# Altium PCB dalang-v1.3_20211125.PcbDoc (part 2 of 5)
Units mil, origin at the board's own origin, x right, y up, seen from the top; angles counter-clockwise.
Board outline 4000 x 3999.92 mil, 4 copper layers (Top, gnd, vcc, Bottom), stack 35.4 mil thick; 365 components, 335 nets, 1640 pads, 1414 vias.
Unrouted connection lines stored in the file: 894.
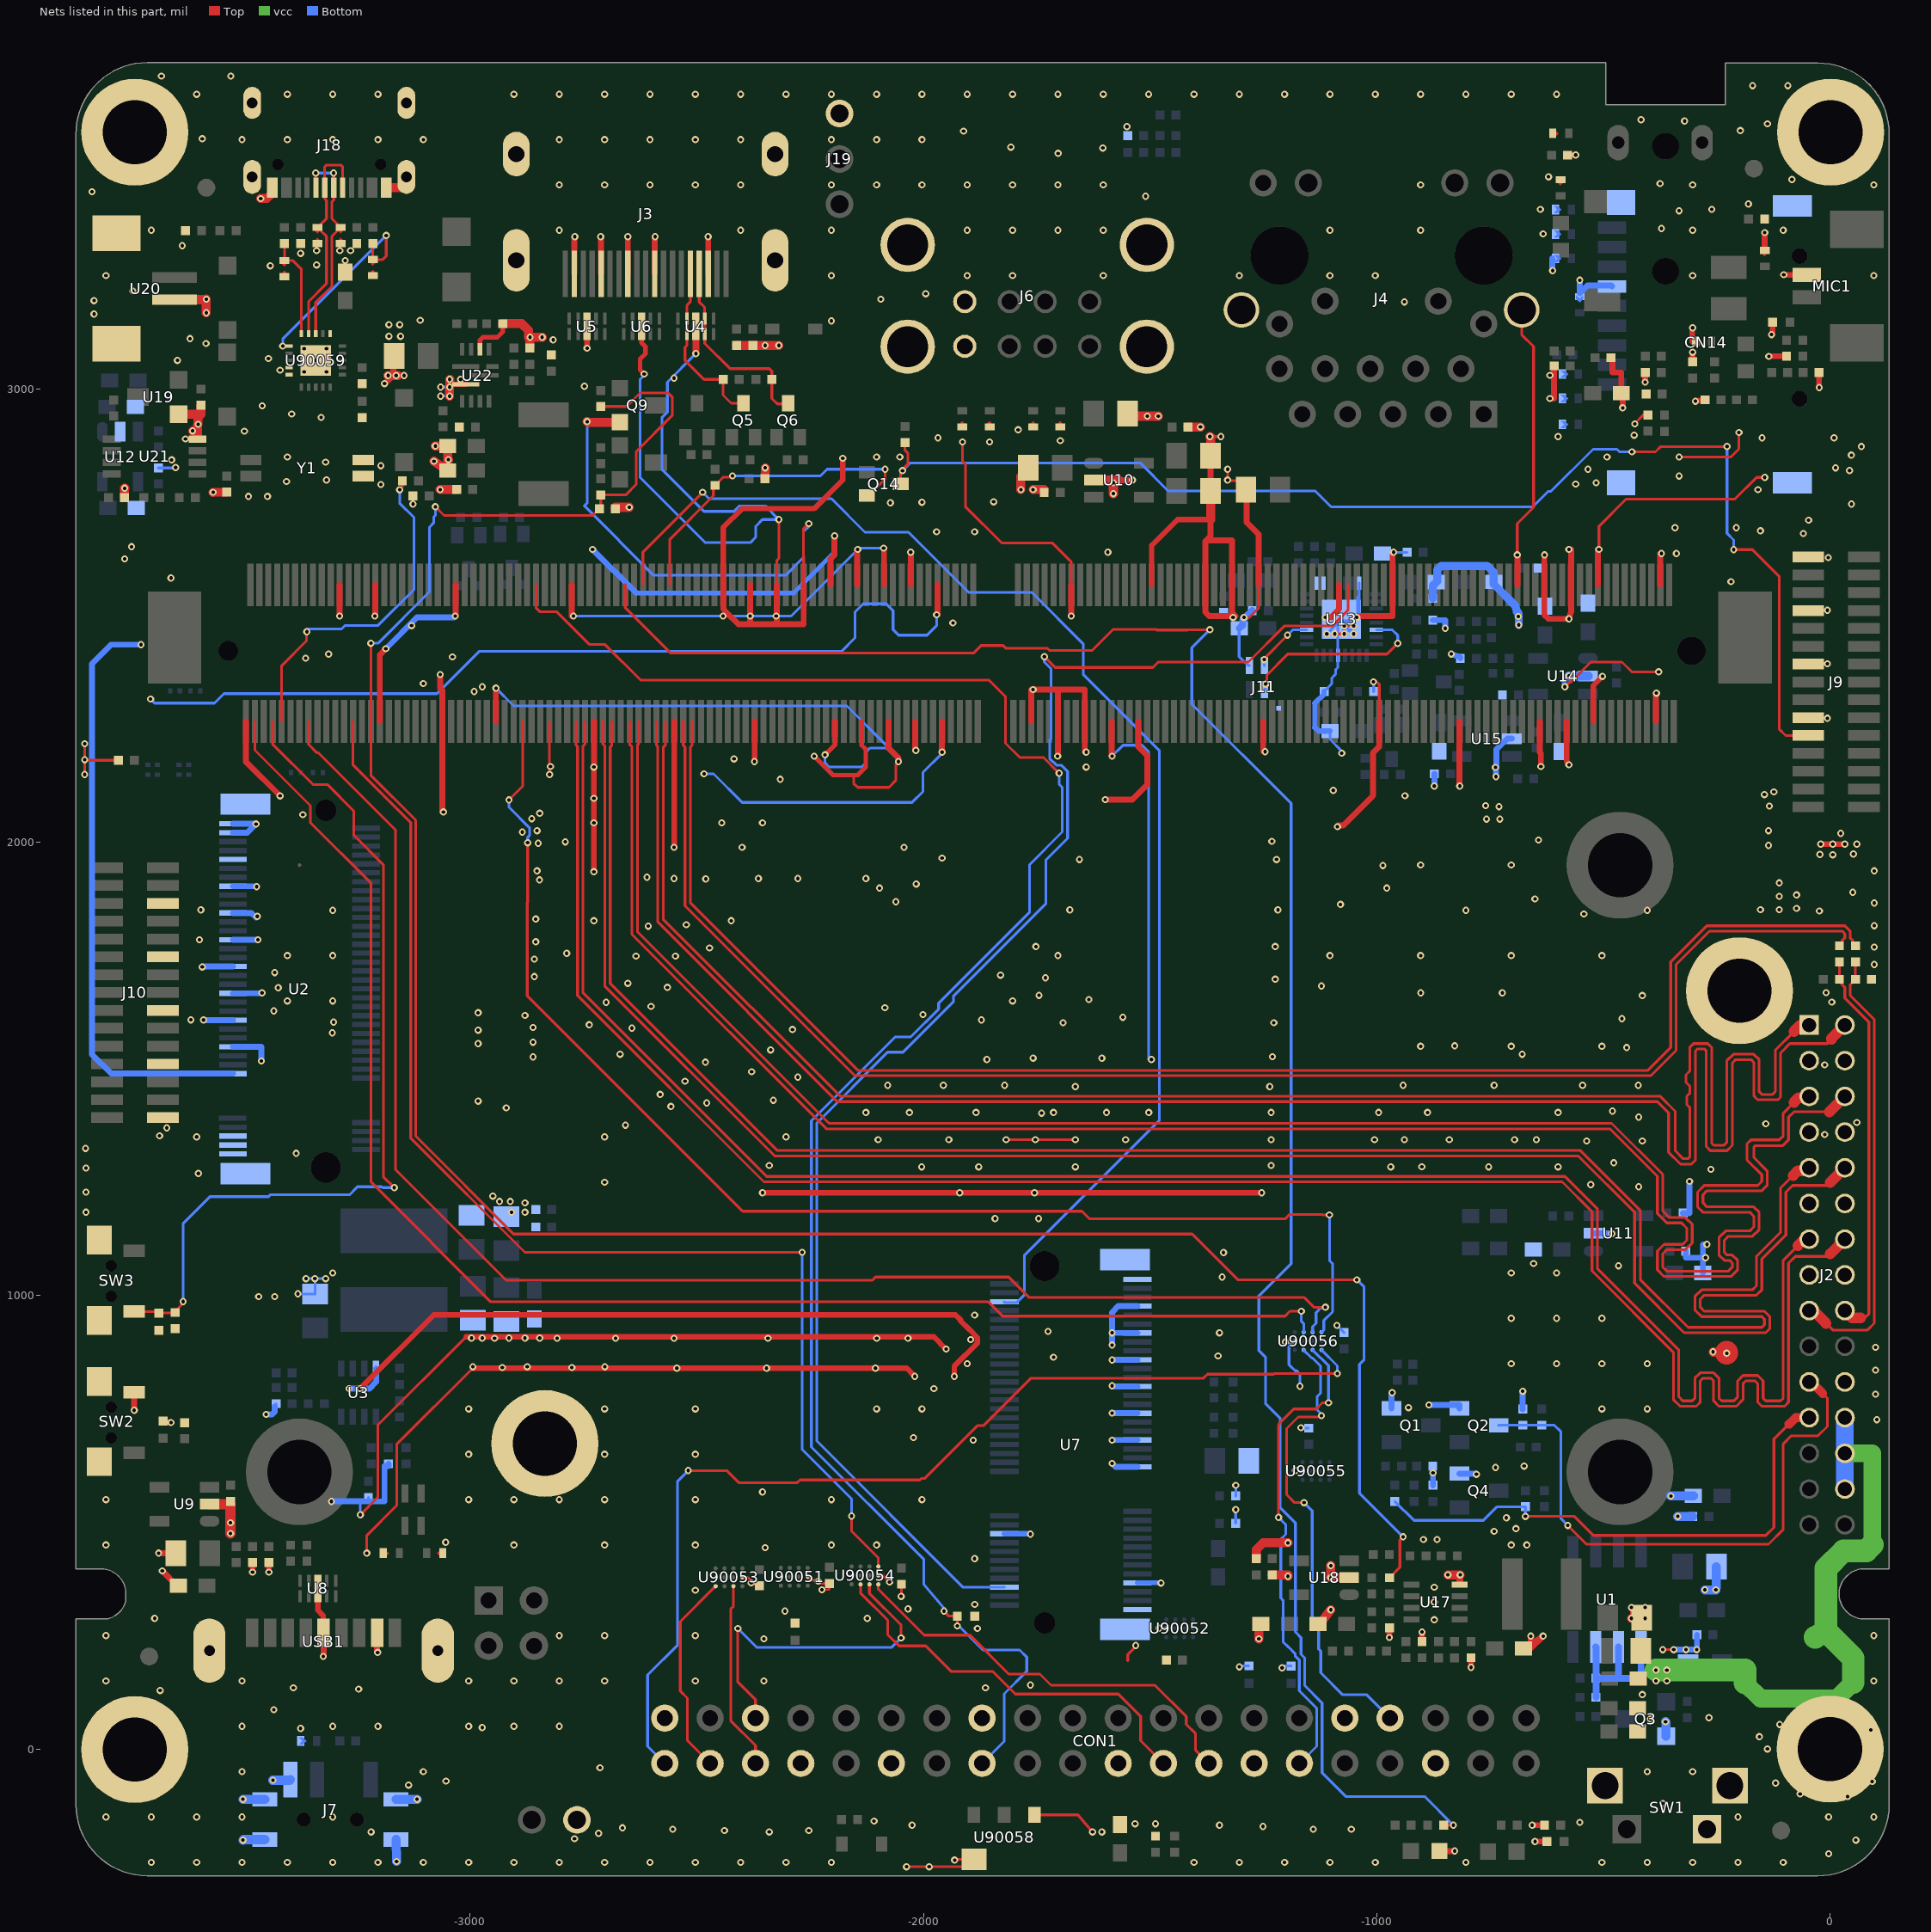
[diagram p3: the nets of this part, all layers, seen from the top]

## Via types
v1: diameter 15.75, hole 7.87, Top to Bottom, 1414 vias

## Nets (pads, with @x,y where several pads share a name; then routed paths per layer and width w, separated by ;. In a path a pad name is that pad's centre, name@x,y a point inside that pad or via, vN(x,y) a via of type N, cw(c..) or ccw(c..) an arc to the next point about the centre after c; other vN are vias at no path point) (continued)
ADC0_IN1: CON1.26 ED28.1 | length 4154.8
  Top w5.91: v1(-1954.72,304.13) -1943.71,293.12 ED28.1@-1925.2,293.12 v1(-1925.2,271.65)
  Top w6: -2854.72,2567.72 -2854.72,2517.47 -2845.48,2508.23 -2808.68,2508.23 -2737.19,2436.74 -2702.96,2436.74 -2623.89,2357.67 -1855.5,2357.67 -1818.95,2321.13 -1818.95,2218.46 -1787.77,2187.28 -1735.51,2187.28 v1(-1700.79,2152.56)
  Bottom w5.91: v1(-1954.72,304.13) -1949.37,304.13 -1951.61,306.77 -1999.02,362.63 -1999.02,417.9 -2247.09,665.98 -2247.09,1385.64 -2061.86,1570.87 -2027.75,1570.87 -1966.54,1632.08 -1966.54,1645.32 -1765.75,1846.11 -1765.75,1951.01 -1693.82,2022.94 -1693.82,2121.43 -1700.79,2128.4 v1(-1700.79,2152.56) ; v1(-1925.2,271.65) -1922.24,271.65 -1869.09,218.5 -1787.83,218.5 -1772.14,202.81 -1772.14,171.21 -1821.85,121.51 -1821.85,16.73 CON1.26@-1870.47,-31.89
BL_ADJ1: J2.23 R16.2 R18.1 | length 1204.3
  Top w5.91: v1(-672,513) -563.98,513 -521.98,471 -491.03,471
  Top w6: -491.03,471 -141.73,471 -124.02,488.72 -124.02,683.62 -90.82,716.81
  Top w19.68: -90.82,716.81 -89.4,716.81 -75.35,730.86 J2.23@-46,730.86
  Bottom w6: R16.2@-960,546.28 -918,504.28 -765,504.28 -735.28,534 -672.28,534 R18.1@-672,534.28 v1(-672,513)
BL_EN1: C12.1 J2.21 Q2.3 R10.1 | length 1281.2
  Top w5.91: v1(-578.74,493.11) -537.4,451.77 -135.83,451.77 -103.35,484.25 -103.35,673.23 -85.63,690.94 -26.57,690.94 -5.91,711.61 -5.91,773.62 -16.24,783.96
  Top w19.68: J2.21@-46,809.6 -41.88,809.6 -16.24,783.96
  Bottom w5.91: -608.27,714.28 -593.5,699.52 -593.5,507.87 v1(-578.74,493.11)
  Bottom w6: Q2.3@-730.69,714 -730.41,714.28 -608.27,714.28
BT_WAKE: U7.70 | length 2919.3
  Top w6: -2618.5,2567.72 -2618.5,2625 -2619,2625 -2619,2640 v1(-2487,2772)
  Bottom w6: v1(-2487,2772) -2472.87,2757.87 -2202.87,2757.87 -2129.06,2684.06 -2033.06,2684.06 -1900.18,2551.18 -1761.02,2551.18 -1647.64,2437.8 -1647.64,2370.31 -1479.33,2202 -1479.33,1386.88 -1777.56,1088.65 -1777.56,1001.49 -1794.15,984.9 -1821.46,984.9 U7.70@-1821.46,986.62
CAM_PWR: J9.5 Q14.3 R136.2 | length 2795.4
  Top w5.91: Q14.3@-2050.2,2790.35 -2050.2,2818.25 v1@-2048.57,2819.88 ; v1(-2046.26,2819.88) v1@-2048.57,2819.88 ; R136.2@-2040.35,2881.89 -2040.44,2881.97 -2041.2,2881.97 -2041.2,2865.38 -2034.45,2858.63 -2034.45,2834 v1@-2048.57,2819.88 ; v1(-437.01,2861.22) -385.17,2861.22 -373.36,2873.03 v1(-227.36,2873.03) ; v1(-212.6,2645.67) -171.26,2645.67 -112.2,2586.61 -112.2,2250 -97.69,2235.48 J9.5@-48,2235.48
  Bottom w5.91: v1(-2046.26,2819.88) -2029.19,2836.95 -1521.9,2836.95 -1459.95,2775 -1135.5,2775 -1100.55,2740.05 -655.95,2740.05 -622.05,2773.95 -615.81,2773.95 -522.64,2867.13 -470.24,2867.13 -464.34,2861.22 v1(-437.01,2861.22) ; v1(-227.36,2873.03) -227.36,2681.62 -212.6,2666.86 v1(-212.6,2645.67)
CAM_PWR1: Q14.2 R120.1 | length 727.8
  Top w5.91: R120.1@-2459.65,2787.4 -2441.93,2805.12 -2424.21,2805.12 v1(-2421.26,2808.07) ; Q14.2@-2125,2764.76 -2121.06,2764.76 -2084.65,2801.18 v1(-2084.65,2822.83)
  Top w6: -2559.45,2567.72 -2559.45,2668.39 -2463.33,2764.51 -2463.33,2783.72 R120.1@-2459.65,2787.4
  Bottom w5.91: v1(-2421.26,2808.07) -2227.39,2808.07 -2212.63,2822.83 v1(-2084.65,2822.83)
CARRIER_PWR_ON: R90557.2 | length 765.6
  Top w5.91: -3415.75,2266.54 -3415.75,2389.76 -3360.63,2444.88 -3360.63,2470.08 v1(-3360.24,2464.57) ; v1(-3155.51,2777.56) -3149.61,2783.46 R90557.2@-3149.61,2797.24
  Bottom w5.91: v1(-3360.24,2464.57) -3360.24,2470.47 -3283.46,2470.47 -3275.59,2478.35 -3202.76,2478.35 -3124.02,2557.09 -3124.02,2716.54 -3155.51,2748.03 v1(-3155.51,2777.56)
CC1: ED8122.1 R109.2 U90059.11 | length 466
  Top w5.91: v1(-3413.39,3094.49) U90059.11@-3399.61,3094.49 ; R109.2@-3214.57,3320.87 ED8122.1@-3214.57,3285.43 -3208.57,3285.43 -3207.07,3285.43 -3192.91,3285.43 -3185.04,3293.31 v1(-3185.04,3338.58)
  Bottom w5.91: v1(-3413.39,3094.49) -3413.39,3110.24 v1(-3185.04,3338.58)
CC2: ED8123.1 R108.2 U90059.10 | length 224.7
  Top w5.91: R108.2@-3409.45,3320.87 ED8123.1@-3409.45,3283.46 -3403.45,3283.46 -3401.95,3283.46 -3391.73,3283.46 -3372.05,3263.78 U90059.10@-3372.05,3122.05
DDC_SCL: J3.15 Q5.3 R29.2 U4.2 U4.9 | length 384.3
  Top w6: J3.15@-2514.25,3253.6 -2514.25,3192 -2520,3186.25 -2520,3186 -2521.69,3184.32 U4.9@-2521.69,3155.22 U4.2@-2521.69,3120.78 -2521.69,3096 -2526,3091.68 -2526,3063 -2484,3021 R29.2@-2441.72,3021 -2442,3020.72 -2442,2986.4 -2424,2968.4 Q5.3@-2397,2968.4
DDC_SDA: J3.16 Q6.3 R31.2 U4.4 U4.7 | length 433.6
  Top w6: J3.16@-2494.56,3253.6 -2494.56,3192 -2482.56,3180 -2482.56,3155.47 U4.7@-2482.32,3155.22 U4.4@-2482.32,3120.78 -2482.32,3100.32 -2426.72,3044.72 -2340,3044.72 -2334.28,3039 R31.2@-2334.28,3021 -2334.28,2979 -2322.28,2967 -2299.4,2967 Q6.3@-2298,2968.4
DM: ED8121.1 J18.A7 J18.B7 U90059.9 | length 491.2
  Top w5.91: U90059.9@-3356.3,3122.05 -3356.3,3192.91 -3316.93,3232.28 -3316.93,3336.61 -3330.61,3350.3 -3332.11,3351.8 -3333.11,3352.8 ED8121.1@-3336.61,3356.3 -3316.93,3375.98 -3316.93,3415.75 -3320.47,3419.29 J18.A7@-3320.47,3444.09 -3320.87,3444.49 -3320.87,3490.16 -3316.93,3494.09 -3285.43,3494.09 -3281.1,3489.76 J18.B7@-3281.1,3444.09
DMIC_CLK: J11.3 U13.11 | length 135.7
  Top w6: v1(-1248,2403) -1248,2406 v1(-1197,2457)
  Bottom w5.91: v1(-1197,2457) -1185.5,2468.5 U13.11@-1154.53,2468.5
  Bottom w6: v1(-1248,2403) -1248,2390.15 J11.3@-1247.54,2390.15
DMIC_SDA: J11.4 U13.30 | length 423.1
  Top w6: v1(-1245,2349) -1242.52,2349 -1242.52,2368.94 -1196.46,2415 -977.72,2415 v1(-953.74,2438.98)
  Bottom w5.91: U13.30@-1000.98,2468.5 -965.55,2468.5 -953.74,2456.69 v1(-953.74,2438.98)
  Bottom w6: J11.4@-1247.54,2337 -1245,2339.54 v1(-1245,2349)
DP: ED8120.1 J18.A6 J18.B6 U90059.8 | length 459.1
  Top w5.91: U90059.8@-3340.55,3122.05 -3340.55,3190.94 -3305.12,3226.38 -3305.12,3336.61 -3290.93,3350.8 -3289.43,3352.3 -3287.93,3353.8 ED8120.1@-3285.43,3356.3 -3305.12,3375.98 -3305.12,3412.99 -3300.79,3417.32 -3300.79,3475.98 v1(-3301.18,3476.38) ; v1(-3340.55,3476.38) -3340.55,3444.49 J18.B6@-3340.16,3444.09
  Bottom w5.91: v1(-3340.55,3476.38) v1(-3301.18,3476.38)
EDP_AUXN: C7.2 J2.18 R6.1 | length 866.8
  Top w5.91: C7.2@20.67,1736.22 20.67,1691.93 32.48,1680.12 32.48,1656.5 85.63,1603.35 85.63,959.65 76.77,950.79 67.91,950.79
  Top w23.62: J2.18@32.74,967.08 49.03,950.79 67.91,950.79
EDP_AUXP: C6.2 J2.17 R7.1 | length 992.9
  Top w5.91: J2.17@-46,964.59 J2.17@-46,967.08 ; -8.86,938.98 5.91,924.21 82.68,924.21 97.44,938.98 97.44,1609.25 44.29,1662.4 44.29,1686.02 R7.1@56.1,1697.83 C6.2@56.1,1736.22
  Top w23.62: J2.17@-46,964.59 -34.47,964.59 -8.86,938.98
EDP_TX0N: J2.2 | length 4193.8
  Top w6: -2588.98,2266.54 -2588.98,2213.98 -2586,2211 -2586,1824 -2190,1428 -381,1428 -356.24,1403.24 -356.24,1316.24 -330,1290 -306,1290 -297,1299 -297,1539.55 -292.33,1544.22 -277.56,1544.29 -273,1539.73 -273,1328.88 -264,1319.88 -227.23,1319.88 -215.42,1331.69 -215.42,1513.52 -208.27,1520.67 -174.21,1520.67 -168.31,1514.76 -168.31,1440.94 -159.45,1432.09 -115.16,1432.09 -109.25,1437.99 -109.25,1535.43 -88.58,1556.1 -5.2,1556.1 2.99,1564.93 ; J2.2@28.56,1592.49 J2.2@32.74,1597
  Top w23.62: 2.99,1564.93 2.99,1566.92 J2.2@28.56,1592.49
EDP_TX0P: J2.1 | length 4096.5
  Top w6: -2569.29,2266.54 -2569.29,2214 -2574,2209.29 -2574,1830 -2184,1440 -375,1440 -341.52,1406.52 -341.52,1319.52 -324,1302 -313.5,1302 -309,1306.5 -309,1414.37 -315.94,1421.31 -315.94,1439.91 -309,1446.85 -309,1461.61 -317.86,1470.47 -317.86,1487.15 -309,1496.01 -309,1548.28 -301.18,1556.1 -269.86,1556.1 -261,1547.24 -261,1336.19 -256.5,1331.69 -233.91,1331.69 -228,1337.6 -228,1517.72 -213.24,1532.48 -168.31,1532.48 -156.5,1520.67 -156.5,1449.8 -150.59,1443.9 -126.97,1443.9 -120.84,1450.02 -120.84,1541.34 -79.5,1582.68
  Top w23.62: -79.5,1582.68 -65.18,1597 J2.1@-46,1597
EDP_TX1N: J2.6 | length 4330.3
  Top w6: -2648.03,2266.54 -2648.03,2216.03 -2643,2211 -2643,1797 -2214,1368 -485.59,1368 -380.91,1263.32 -380.91,1181.1 -360.24,1160.43 -327.76,1160.43 -315.94,1148.62 -315.94,1122.05 -324.8,1113.19 -366.14,1113.19 -380.91,1098.43 -380.91,1057.09 -366.14,1042.32 -218.5,1042.32 -203.74,1057.09 -203.74,1077.76 -215.55,1089.57 -227.36,1089.57 -233.27,1095.47 -233.27,1122.05 -224.41,1130.91 -171.26,1130.91 -156.5,1145.67 -156.5,1184.06 -168.31,1195.87 -271.65,1195.87 -280.51,1204.72 -280.51,1222.44 -271.65,1231.3 -150.59,1231.3 -138.78,1243.11 -138.78,1275.59 -168.31,1305.12 -168.31,1327.09 -164.53,1330.87 -104.17,1330.87 -91.54,1343.5 -91.54,1393.7 -79.72,1405.51 -1.27,1405.51
  Top w23.62: -1.27,1405.51 J2.6@32.74,1439.52
EDP_TX1P: J2.5 | length 4229.3
  Top w6: -2628.35,2266.54 -2628.35,2216.65 -2631,2214 -2631,1803 -2208,1380 -481.78,1380 -369.09,1267.31 -369.09,1187.01 -354.33,1172.24 -318.9,1172.24 -304.13,1157.48 -304.13,1116.14 -318.9,1101.38 -360.24,1101.38 -369.09,1092.52 -369.09,1062.99 -360.24,1054.13 -224.41,1054.13 -215.55,1062.99 -215.55,1071.85 -221.46,1077.76 -233.27,1077.76 -245.08,1089.57 -245.08,1127.95 -230.32,1142.72 -177.17,1142.72 -168.31,1151.57 -168.31,1175.2 -177.17,1184.06 -280.51,1184.06 -292.32,1195.87 -292.32,1228.35 -277.56,1243.11 -159.45,1243.11 -150.59,1251.97 -150.59,1266.73 -183.07,1299.21 -183.07,1334.65 -174.21,1343.5 -112.2,1343.5 -103.35,1352.36 -103.35,1402.56 -79.72,1426.18 ; J2.5@-48.86,1436.66 J2.5@-46,1439.52
  Top w23.62: -79.72,1426.18 -69.25,1436.66 J2.5@-48.86,1436.66
EDP_TX2N: J2.10 | length 4308.4
  Top w5.91: J2.10@23.62,1272.92 J2.10@30.86,1280.16
  Top w6: -2707.09,2266.54 -2707.09,2217 -2703,2212.91 -2703,1683 -2328,1308 -555.05,1308 -431.1,1184.06 -431.1,1027.56 -321.85,918.31 -141.73,918.31 -132.87,927.17 -132.87,953.74 -144.69,965.55 -277.56,965.55 -286.42,974.41 -286.42,992.13 -277.56,1000.98 -162.4,1000.98 -150.59,1012.8 -150.59,1080.7 -97.44,1133.85 -97.44,1228.35 -82.68,1243.11 -5.91,1243.11 0,1249.02 0,1249.3 ; J2.10@30.86,1280.16 J2.10@32.74,1282.04
  Top w23.62: 0,1249.3 J2.10@23.62,1272.92
EDP_TX2P: J2.9 | length 4203.5
  Top w5.91: -82.68,1263.78 -81.2,1265.26
  Top w6: -2687.4,2266.54 -2687.4,2214 -2691,2210.4 -2691,1689 -2322,1320 -550.67,1320 -418.48,1187.82 -418.48,1035.61 -312.99,930.12 -150.59,930.12 -144.69,936.02 -144.69,947.83 -150.59,953.74 -283.46,953.74 -298.23,968.5 -298.23,998.03 -283.46,1012.8 -171.26,1012.8 -162.4,1021.65 -162.4,1086.44 -109.25,1139.59 -109.25,1237.2 -82.68,1263.78 ; J2.9@-46,1275.59 J2.9@-46,1282.04
  Top w23.62: -81.2,1265.26 -70.87,1275.59 J2.9@-46,1275.59
EDP_TX3N: J2.14 | length 4443.1
  Top w6: -2766.14,2266.54 -2766.14,2214 -2766,2214 -2763,2211 -2763,1662 -2352,1251 -591,1251 -525,1185 -525,1054.75 -345.47,875.22 -345.47,770.76 -330.71,756 -295.18,756 -286.42,764.76 -286.42,812.01 -280.51,817.91 -262.8,817.91 -256.89,812.01 -256.89,767.81 -245.08,756 -206.6,756 -191.93,770.67 -191.93,806.1 -186.02,812.01 -165.35,812.01 -159.45,806.1 -159.45,764.86 -150.59,756 -100.39,756 -91.54,764.86 -91.54,1071.85 -76.77,1086.61 -5.21,1086.61 0.35,1092.17
  Top w23.62: 0.35,1092.17 J2.14@32.74,1124.56
EDP_TX3P: J2.13 | length 4333.7
  Top w6: -2746.46,2266.54 -2746.46,2217 -2751,2212.46 -2751,1668 -2346,1263 -585,1263 -513,1191 -513,1059 -333.79,879.79 -333.79,776.86 -324.93,768 -303.85,768 -298.23,773.62 -298.23,817.91 -286.42,829.72 -256.89,829.72 -245.08,817.91 -245.08,773.91 -239.17,768 -212.32,768 -203.74,776.57 -203.74,812.01 -191.93,823.82 -159.45,823.82 -147.64,812.01 -147.64,773.91 -141.73,768 -109.25,768 -103.35,773.91 -103.35,1077.76 -70.87,1110.24 ; J2.13@-47.24,1124.56 J2.13@-46,1124.56
  Top w23.62: -70.87,1110.24 -56.54,1124.56 J2.13@-47.24,1124.56
EDPAUXN: C7.1 | length 3398.9
  Top w6: -2529.92,2266.54 -2529.92,2214 -2526,2210.08 -2526,1860 -2151,1485 -395.67,1485 -339.57,1541.1 -339.57,1730.31 -265.75,1804.13 26.57,1804.13 32.48,1798.23 32.48,1789.37 26.57,1783.46 26.57,1777.56 C7.1@20.67,1771.65
EDPAUXP: C6.1 | length 3401.8
  Top w6: -2510.24,2266.54 -2510.24,2214 -2514,2210.24 -2514,1866 -2145,1497 -401.57,1497 -351.38,1547.2 -351.38,1736.22 -271.65,1815.94 32.48,1815.94 44.29,1804.13 44.29,1789.37 50.2,1783.46 50.2,1771.65 C6.1@56.1,1771.65
EXT_EN_H: R84.2 R95.2 R96.2 R98.1 | length 5320.5
  Top w6: v1(-3219,2439) -3218.9,2438.9 -3218.9,2147.63 -3120.08,2048.81 -3120.08,1351.76 -2904.15,1135.83 -1407.33,1135.83 -1306.5,1035 v1(-1044,1035) ; v1(-3076.77,2740.16) -3057.61,2721 -2729.72,2721 R98.1@-2714.72,2736 -2712,2738.72 R95.2@-2712,2766.28 -2656.9,2766.28 -2633.86,2789.33 -2633.86,2861.39 -2554.13,2941.11 -2554.13,2982.45 -2562.83,2991.14 -2625.11,2991.14 -2654.97,2961.28 R96.2@-2712,2961.28 ; R84.2@-972,377.72 -948.81,400.91 -948.81,461.19 v1(-942,468)
  Bottom w6: v1(-3219,2439) -3203.33,2439 -3089.69,2552.63 -3089.69,2695.18 -3080.5,2704.37 -3080.5,2717.16 -3076.77,2720.9 v1(-3076.77,2740.16) ; v1(-1044,1035) -1027.95,1018.95 -1027.95,859.06 -1038.19,848.82 -1038.19,564.19 v1(-942,468)
FORCE_RECOV#: C3.1 ED3.1 SW3.1 | length 1953.9
  Top w6: SW3.1@-3741.14,964.85 -3690.21,964.85 ED3.1@-3687,961.64 -3652.08,961.64 C3.1@-3651,962.72 -3651,965.52 -3635.05,981.48 -3635.05,984.95 v1(-3633,987) ; -3435.43,2266.54 -3435.43,2216.29 -3346.7,2127.56 -3315.25,2127.56 -3256.69,2069 -3256.69,2015.88 -3191.34,1950.52 -3191.34,1262.2 v1(-3167.32,1238.19)
  Bottom w6: v1(-3633,987) -3633,1159.45 -3573.95,1218.5 -3444.88,1218.5 -3440.94,1222.44 -3266.19,1222.44 -3248.47,1240.16 -3195.17,1240.16 -3193.21,1238.19 v1(-3167.32,1238.19)
FT1: C10.1 J2.24 J2.26 J2.28 R9.1 U1.1 U1.2 U1.3 | length 1787.2
  vcc w6: -153,111 -147,111
  vcc w39.37: J2.26@32.74,652.12 93.31,652.12 93.31,450.6
  vcc w40: -187.5,145.5 -153,111 ; -147,111 15,111 51,147
  vcc w50: v1(-384,174) v1(-360,174) -187.5,174 -187.5,145.5 ; -32.68,246.32 -8.86,260.14 ; 51,147 51,200.28 -8.86,260.14 ; 93.31,450.6 79.72,437.01 29.53,437.01 -8.86,398.62 -8.86,260.14
  Bottom w6: v1(-384,150) v1(-384,174) v1(-360,174) v1(-360,150)
  Bottom w15: U1.3@-517,225 -516.28,224.28 C10.1@-516.28,156 ; R9.1@-516.28,114 C10.1@-516.28,156 ; U1.2@-467,225 -467,156.5 -467.5,156 ; U1.1@-417,225 -417,168 ; v1(-384,174) -417,168 ; C10.1@-516.28,156 -467.5,156 ; -467.5,156 -429,156 -417,168
  Bottom w39.37: J2.28@32.74,573.38 J2.26@32.74,652.12 32.74,693.9 J2.24@32.74,730.86
GND: C1.2 C2.2 C3.2 C4.2 C5.2 C8.2 C9.2 C11.2 C12.2 C23.2 C24.1 C25.2 C26.2 C27.2 C28.2 C29.2 C30.2 C31.2 C32.2 C33.2 C34.2 C35.2 C36.2 C37.1 C38.2 C39.2 C42.2 C45.2 C46.2 C47.2 C48.2 C49.2 C50.2 C51.2 C52.2 C53.2 C54.2 C55.2 C56.2 C57.2 C58.2 C59.2 C61.2 C62.2 C63.2 C64.2 C65.2 C66.2 C67.2 C68.2 C69.2 C70.2 C72.2 C73.2 C74.2 C75.2 C76.2 C77.2 C78.2 C79.2 C80.2 C81.2 C82.2 C83.1 C84.2 C85.2 C86.1 C87.1 C90.2 C91.1 C92.2 C93.2 C94.2 C95.2 C96.2 C97.2 C98.1 C99.2 C100.1 C101.1 C102.2 C104.2 C105.2 C106.2 C107.2 C108.2 C109.2 C110.2 C115.2 C90286.2 C90287.1 C90295.1 C90296.1 C90297.1 C90298.1 C90299.1 C90300.1 C90301.2 CN14.6 CN14.10 CN14.11 CN14.12 CN14.13 CON1.6 CON1.9 CON1.14 CON1.20 CON1.25 CON1.30 CON1.34 CON1.39 E1.2 ED1.2 ED2.2 ED3.2 ED4.2 ED5.2 ED6.2 ED7.2 ED8.2 ED9.2 ED10.2 ED11.2 ED12.2 ED13.2 ED14.2 ED15.2 ED16.2 ED17.2 ED18.2 ED19.2 ED20.2 ED21.2 ED22.2 ED25.2 ED26.2 ED27.2 ED28.2 ED8120.2 ED8121.2 ED8122.2 ED8123.2 J2.3 J2.4 J2.7 J2.8 J2.11 J2.12 J2.15 J2.16 J2.22 J3.2 J3.5 J3.8 J3.11 J3.17 J3.20 J3.21 J3.22 J3.23 J4.19 J4.20 J6.4 J6.8 J6.9 J6.10 J6.11 J6.12 J7.3 J7.6 J7.7 J7.8 J7.9 J9.6 J9.9 J9.12 J9.15 J10.3 J10.6 J10.9 J10.12 J10.15 J11.2 J11.5 J12.1 J13.1 J14.1 J15.1 J16.1 J17.1 J18.A1 J18.A12 J18.B1 J18.B12 J18.E1 J18.E2 J18.E3 J18.E4 J19.3 LED2.2 MIC1.2 Q1.2 Q2.2 Q3.2 Q4.2 Q9.2 R5.1 R7.2 R14.1 R20.1 R26.2 R27.2 R40.1 R44.1 R48.1 R49.1 R50.2 R51.2 R53.2 R88.2 R90.2 R98.2 R104.1 R121.1 R90541.2 R90545.2 R90549.1 R90551.1 R90552.1 SW1.1 SW1.3 SW1.4 SW2.2 SW2.3 SW2.4 SW3.3 SW3.4 U2.1 U2.3 U2.9 U2.15 U2.21 U2.27 U2.33 U2.39 U2.45 U2.51 U2.57 U2.71 U2.73 U2.75 U2.76 U2.77 U3.4 U4.3 U4.8 U5.3 U5.8 U6.3 U6.8 U7.1 U7.7 U7.18 U7.33 U7.39 U7.45 U7.51 U7.57 U7.63 U7.69 U7.75 U7.76 U7.77 U8.3 U8.8 U9.2 U10.2 U11.2 U12.2 U13.5 U13.17 U13.18 U13.23 U13.33 U14.2 U15.2 U17.4 U18.2 U19.1 U20.1 U20.3 U20.4 U21.4 U22.2 U22.10 U90051.D2 U90052.D2 U90053.D2 U90054.D2 U90055.D2 U90056.D2 U90057.2 U90058.3 U90058.4 U90059.6 U90059.14 U90059.15 U90059.21 USB1.4 USB1.7 USB1.10 USB1.11 Y1.3 Y1.4 | length 34971.4
  Top w5.91: v1(-3850.39,2149.61) v1(-3850.39,2182.09) ; v1(-3850.39,2217.52) v1(-3850.39,2182.09) ; C57.2@-3775.97,2180.84 -3849.15,2180.84 v1(-3850.39,2182.09) ; v1(-3627.95,2889.76) -3627.67,2889.48 U21.4@-3601.52,2889.48 ; C104.2@-3169.4,3070.76 C104.2@-3167.32,3072.83 ; -2825.2,2266.54 -2825.2,2150 v1(-2824.8,2149.61) ; U90053.D2@-2399.38,378.68 -2387.8,378.68 -2379.92,370.81 v1(-2379.92,366.14) -2377.59,368.48 -2368.11,359 -2362.2,359 C90297.1@-2362.2,360.24 ; U90051.D2@-2255.47,379.86 -2247.66,372.05 -2232.28,372.05 v1@-2232.28,371.08 ; v1(-2232.28,370.08) v1@-2232.28,371.08 ; v1(-2224.02,351.18) -2207.53,351.97 C90295.1@-2207.53,365.18 -2226.38,365.18 v1@-2232.28,371.08 ; U90054.D2@-2099.41,382.87 -2088.58,382.87 -2088.58,381.89 v1(-2074.8,368.11) ; v1(-2049.21,336.61) -2048.58,337.25 C90296.1@-2048.58,363.48 ; v1(-2037.4,-259.84) v1(-1987.2,-259.84) -1904.13,-259.84 U90058.4@-1887.99,-243.7 -1929.72,-243.7 v1(-1931.1,-245.08) ; v1(-1817.72,1344.09) v1(-1753.15,1344.09) -1753.06,1344 v1(-1665,1344) ; U90058.3@-1754.92,-145.28 -1659.45,-145.28 v1(-1626.97,-183.07) ; -1549.21,194.88 -1549.21,208.66 -1531.5,226.38 v1(-1531.5,228.35) ; v1(-1092.52,2459.65) v1(-1071.85,2459.65) v1(-1071.85,2477.36) v1(-1051.18,2477.36) ; v1(-1007.09,2353.94) -999.61,2353.94 -994.49,2348.82 -994.49,2266.54 ; R90541.2@-578.74,3515.75 -575.06,3515.75 R90541.2@-574.8,3516 ; v1(-430.71,2922.83) -430.71,2924.02 -412.2,2942.52 C38.2@-401.57,2942.52
  Top w6: U21.4@-3601.52,2889.48 -3601.52,2898 ; U8.8@-3336,338.74 U8.3@-3336,369.26 ; v1(-3242.13,516.73) -3203.74,555.12 -3203.74,714.26 -3009,909 ; v1(-3228,432) -3228,471 -3162,537 -3162,672 -2994,840 v1(-2994,843) ; -2323.23,2567.72 -2323.23,2622 -2319,2626.23 v1(-2319,2712) ; -2264.17,2567.72 -2264.17,2630.17 -2265,2631 -2265,2691 v1(-2253,2703) ; -2154,2148 -2154,2130 -2145,2121 -2076,2121 -2061,2136 -2061,2172 v1(-2055,2178) ; v1(-1914,2883) -1914,2840.79 -1907.48,2834.27 -1907.48,2740.26 -1827.65,2660.43 -1716.09,2660.43 -1673.62,2617.96 -1673.62,2567.72 ; -1371,2712 -1366.6,2712 ; v1(-1368,2895) v1(-1344,2895) ; v1(-1329,2823) v1(-1329,2799) -1327.6,2797.6 -1308,2797.6 C37.1@-1288.4,2778 ; v1(-1317,2496) v1@-1311.35,2499.35 ; v1(-1293,2496) -1292.76,2496.24 -1281,2496.24 -1260.24,2517 -1260.24,2567.72 ; v1@-964.96,2637 -963,2638.96 v1(-963,2640) ; v1(-690,2634) -690,2703 -654,2739 -654,3093.68 -680.32,3120 J4.19@-680.32,3174.41 ; v1(-585,2343) -574.59,2353.41 -571.81,2353.41 -527.58,2397.64 -459.05,2397.64 -437.42,2376 v1(-378,2376) ; v1(-510,2646) -510,2697 -450,2757 -210,2757 -162,2805 v1(-144,2805) ; v1(-438,288) v1(-438,312) v1(-408,312) ; v1(-369,219) v1(-345,219) ; v1(-333,2850) -219,2850 -201,2868 v1(-201,2904)
  Top w10: U22.2@-3024,3010.31 -3022.95,3014.05 v1(-3021,3021) ; U22.10@-2978.16,3087.09 -2978.16,3108 -2972.16,3114 -2940,3114 -2928,3126 -2928,3143.72 R104.1@-2928.28,3144 ; U6.3@-2622,3122.74 -2622,3102 -2613,3093 -2613,3078 -2625,3066 -2625,3042 v1(-2616,3033) ; v1(-2241,2190) -2199,2148 -2154,2148 -2145,2148 -2127,2166 -2127,2204.78 -2136.22,2214 -2136.22,2266.54 ; v1(-2217,2193) -2195.28,2214.72 -2195.28,2235
  Top w12: U8.8@-3336,338.74 -3336,306 -3324,294 -3324,257.07 USB1.7@-3323.23,256.3 ; v1(-3243,795) -3080.15,957.85 -1929.19,957.85 -1917.96,946.62 -1917.96,944.43 -1897.62,924.09 -1897.47,924.09 -1880.91,907.53 -1880.91,895.27 -1932,844.17 v1(-1932,822) ; v1@-3045,3010.31 -3024,3010.31 U22.2@-3009.65,3010.32 ; -3009,909 -2997.05,909 -2914.37,909 -2808,909 -2343,909 -1977,909 v1(-1950,882) ; v1@-2994,840 -2775.59,840 v1(-2544,840) v1(-2346,840) v1(-2106,840) -2037,840 v1(-2019,822) ; v1(-2742,3090) U5.3@-2742,3122.74 U5.8@-2742,3153.26 ; -2441.34,2567.72 -2441.34,2694.66 -2400,2736 -2241,2736 -2178,2799 v1(-2178,2847) ; -1496.46,2567.72 -1496.46,2655 -1439.46,2712 -1371,2712 ; U17.4@-816.85,362.39 U17.4@-816.85,369 ; -522.05,2266.54 -522.05,2345.95 v1(-502,2366)
  Top w13: SW2.2@-3741.14,786.9 -3741.14,747.14 v1(-3741,747) ; v1(-3687,432) C46.2@-3649.4,432 ; v1(-3679.13,392.72) -3646.74,360 C45.2@-3643.5,360 ; ED2.2@-3678,720.85 -3660,720.85 v1(-3660,720) ; U9.2@-3574.88,540 -3568.6,543 R50.2@-3528,543 ; R50.2@-3528.54,540 R50.2@-3528,543 ; R50.2@-3528,546.28 R50.2@-3528,543 ; -3494.49,2266.54 -3494.49,2177.56 v1(-3419.29,2102.36) ; v1(-3480,390) C48.2@-3480,411.28 ; v1(-3444,390) R53.2@-3444,411.28 ; v1(-3324,204) -3323.23,204.77 USB1.7@-3323.23,256.3 ; v1(-3288,2499) -3287.8,2499.2 -3287.8,2567.72 ; v1(-3210,2499) -3209.06,2499.94 -3209.06,2567.72 ; USB1.4@-3205.12,256.3 -3205.12,214.12 v1(-3204,213) ; -3199.21,2266.54 -3199.21,2413.79 v1(-3186,2427) ; v1(-3188.98,3011.81) -3175.83,3023.71 -3169.4,3029.53 C104.2@-3169.4,3070.76 ; v1@-3159.45,3029.53 v1(-3145.67,3029.53) ; v1(-3066,2370) -3066,2340 -3061.42,2335.42 -3061.42,2067.65 -3060.73,2066.97 -3059.2,2066.97 v1(-3059.06,2066.93) ; v1(-3033,2499) -3031.89,2500.11 -3031.89,2567.72 ; -2943.31,2266.54 -2943.31,2339.69 v1(-2943,2340) ; -2775.98,2567.72 -2775.98,2499 v1(-2772,2499) ; J3.2@-2770.15,3253.6 -2770.15,3334.85 v1(-2769,3336) ; v1(-2727,1935) v1(-2727,2043) v1(-2727,2097) v1(-2727,2166) -2726.77,2166.23 -2726.77,2266.54 ; v1(-2712,3336) -2711.1,3335.1 J3.5@-2711.1,3253.6 ; J3.8@-2652.04,3253.6 -2652.04,3335.96 v1(-2652,3336) ; J3.11@-2592.99,3253.6 -2592.99,3335.01 v1(-2592,3336) ; v1(-2550,1989) -2549.61,1989 -2549.61,2266.54 ; v1(-2475,3336) -2474.88,3335.88 J3.17@-2474.88,3253.6 ; -2441.34,2567.72 -2441.34,2513.97 -2434.18,2506.82 -2408.37,2481 -2382.28,2481 ; -2382.28,2567.72 -2382.28,2481 ; v1(-2373,2178) -2372.44,2178 -2372.44,2266.54 ; v1(-2355,1227) v1(-1920,1227) v1(-1755,1227) v1(-1254,1227) ; -2323.23,2567.72 -2323.23,2481 ; -2264.17,2567.72 -2264.17,2481 -2323.23,2481 ; -2205.12,2567.72 -2205.12,2625 -2196.12,2634 -2196.12,2675.88 v1(-2196,2676) ; -2195.28,2235 -2195.28,2266.54 ; -2146.06,2567.72 -2146.06,2646 v1(-2145,2646) ; v1(-2088,2649) -2087.01,2648.01 -2087.01,2567.72 ; -2077.17,2266.54 -2077.17,2208 -2055,2185.83 v1(-2055,2178) ; -2027.95,2567.72 v1(-2028,2640) ; -2018.11,2266.54 -2018.11,2205 -2016.73,2203.62 v1(-2016.73,2202.76) ; v1(-1971,2502) -1968.9,2502 -1968.9,2567.72 ; -1959.06,2266.54 -1959.06,2199 v1(-1959,2199) ; -1762.2,2266.54 -1762.2,2337 v1(-1758,2337) -1707,2337 ; v1(-1704,2190) -1703.15,2190.85 -1703.15,2333.15 -1707,2337 ; v1(-1674,2499) -1673.62,2499 -1673.62,2567.72 ; v1(-1641,2199) -1644.09,2199 -1644.09,2337 -1707,2337 ; v1(-1599,2094) -1539,2094 -1506,2127 -1506,2191.02 -1525.98,2211 -1525.98,2266.54 ; -1585.04,2266.54 -1585.04,2191.04 v1(-1584,2190) ; -1569,2799 v1(-1539,2799) ; -1366.6,2712 -1366.6,2675.75 -1376.17,2666.17 ; C101.1@-1366.6,2775 C100.1@-1366.6,2853 ; v1(-1317,2496) -1320,2499 -1369.35,2499 -1378.35,2508 -1378.35,2664 -1376.17,2666.17 ; v1@-1311.35,2499.35 -1319.29,2507.29 -1319.29,2666.17 -1376.17,2666.17 ; C37.1@-1288.4,2778 -1287.24,2776.83 -1287.24,2706 -1260.24,2679 -1260.24,2567.72 ; -1250.39,2266.54 -1250.39,2199.8 v1(-1246.06,2199.8) ; v1(-1113,2496) -1101.07,2496 -1083.07,2514 -1083.07,2567.72 ; v1(-1086.61,2034.45) -1085.64,2037.04 -1073.96,2037.04 -1008,2103 -1008,2197.49 -994.49,2211 -994.49,2266.54 ; v1(-1044,2496) -1041,2499 -964.96,2499 v1@-964.96,2637 ; v1(-972,246) C91.1@-972,267.28 ; R90.2@-900,236.72 v1(-900,258) ; LED2.2@-861.81,-225.2 -828.2,-225.2 v1(-828,-225) ; -817.32,2266.54 -817.32,2124.02 v1(-816.93,2124.02) ; v1(-792,180) R88.2@-792,201.28 ; v1(-690,2634) -689.37,2634 -689.37,2567.72 ; C90.2@-676.5,222 C90.2@-660,232.24 ; v1(-660,249) C90.2@-660,232.24 ; v1(-657,-168) C1.2@-629.72,-168 ; v1(-651,-204) ED1.2@-624.85,-204 ; -640.16,2266.54 -640.16,2198.43 -637.8,2196.06 v1(-637.8,2167.32) ; v1(-630,2634) -630.32,2634 -630.32,2502 -621.32,2493 v1(-576,2493) -571.26,2508 -571.26,2646 v1(-576,2646) ; v1(-618,2979) -608.72,2979 R49.1@-608.72,3051 ; -581.1,2266.54 -581.1,2180 v1(-576,2171) ; R90541.2@-574.8,3516 v1(-561,3516) ; -512.2,2567.72 -512.2,2646 v1(-510,2646) ; C84.2@-483.28,3069 -480,3065.72 -480,3036.28 -460.5,3036.28 C83.1@-460.5,2991 -457.48,2991 v1(-457.48,2958.27) ; v1(-408,3015) C39.2@-407.72,3036 ; -384.25,2266.54 -384.25,2329 v1(-383,2329) ; -374.41,2567.72 -374.41,2637 v1(-372,2637) ; ED7.2@-304,3105 -304,3134 v1(-303,3135) ; C42.2@-303,3059.72 v1(-303,3081) ; v1(-297,2973) R48.1@-275.72,2976 ; ED6.2@-144,3313 v1(-144,3345) ; v1(-135,3072) -134.72,3072.28 C79.2@-96,3072.28 ; v1(-129,3120) -126.85,3120 ED15.2@-126.85,3147 ; v1(-102,3252) -101.57,3251.57 MIC1.2@-51.18,3251.57 ; C78.2@-24.28,3036 -24.28,3003.28 v1(-24,3003) ; v1(-20.67,1996.06) v1(5.91,1996.06) v1(32.48,1996.06) ; -2382.28,2481 -2323.23,2481 ; C90.2@-660,232.24 -652.49,236.9 v1(-633,249) -660,222 C90.2@-660,232.24
  Top w15: v1(-2502,3078) U4.3@-2502,3122.74 ; U17.4@-816.85,369 -816.85,383.15 v1(-816,384)
  Top w20: C99.2@-3762.28,2760 -3762.28,2781 v1(-3762,2781) ; U20.1@-3652.36,3197.05 -3582.95,3197.05 v1(-3582,3198) v1(-3582,3168) ; U19.1@-3643.5,2944 -3594,2944 ; v1(-3612.2,2907.48) -3601.52,2907.48 ; -3601.52,2898 -3601.52,2907.48 ; C97.2@-3594,2964.28 -3594,2944 ; v1(-3567,2772) C98.1@-3537,2772.28 ; v1(-3462,3420) -3448.61,3420 -3436.61,3432 J18.A12@-3436.61,3444.09 ; J18.B12@-3184.65,3444.09 -3144,3444.09 -3144,3464.27 J18.E3@-3140.55,3467.72 ; v1(-3181.1,3029.53) -3169.4,3029.53 v1(-3163.39,3029.53) v1@-3159.45,3029.53 ; v1(-3079.72,2840.55) -3050.11,2820 C106.2@-3049.5,2820 v1@-3049.5,2842.5 ; v1(-3076.77,2874.02) C105.2@-3049.5,2874 ; v1(-3066,2778) C107.2@-3029.72,2778 ; C105.2@-3049.5,2874 v1@-3049.5,2842.5 ; v1(-3048,2844) v1@-3049.5,2842.5 ; v1(-3045.28,2984.25) v1(-3045.28,3003.94) -3045,3010.31 v1(-3045,3021) ; R104.1@-2928.28,3144 -2886,3144 -2871,3129 -2871,3114 v1@-2868.28,3114 ; C110.2@-2868.28,3090 v1@-2868.28,3114 ; v1(-2841,3114) v1(-2868,3114) v1@-2868.28,3114 ; v1(-2742,2928) -2740.5,2926.5 Q9.2@-2670,2926.5 ; R98.2@-2679.28,2736 -2679.28,2739 v1(-2649,2739) ; C33.2@-2412,3096.28 v1@-2349,3096.28 ; R5.1@-2349.28,2802 v1(-2349,2826) ; v1(-2349,3096) v1@-2349,3096.28 ; v1(-2319,3096) -2319,3096.28 v1@-2349,3096.28 ; v1(-1785,2778) -1785,2806.4 C47.2@-1768.4,2826 ; v1(-1758,2778) -1733.72,2778 R51.2@-1733.72,2772 ; U10.2@-1624.12,2799 -1569,2799 v1(-1581,2793) v1(-1581,2769) ; E1.2@-1549.6,2946 -1542,2940 v1(-1506,2940) v1(-1482,2940) ; C102.2@-1416.28,2916 v1(-1389,2916) ; v1(-1368,2895) -1366.6,2893.6 C100.1@-1366.6,2853 ; -1366.6,2712 C101.1@-1366.6,2775 ; C96.2@-1265.72,420 -1265.72,439.84 -1250.83,454.72 v1(-1195.87,454.72) ; v1(-1260,243) -1260,276 C95.2@-1255.5,276 ; C85.2@-1230.28,384 -1195.87,384 v1(-1195.87,380.91) ; C94.2@-1129.5,276 -1124.96,276 v1(-1101.38,307.09) ; v1(-1101.38,404.53) v1(-1101.38,377.95) U18.2@-1060.88,377.95 ; v1(-843,384) v1(-816,384) ; v1(-438,288) v1(-408,288) ; v1(-258,876) -258,875.2 v1@-228,875.2 ; -3601.52,2907.48 -3601.52,2920.48 v1(-3600,2922) -3600,2938 -3594,2944
  Top w23: U9.2@-3574.88,540 -3528.54,540 v1(-3528.54,499.02) v1(-3528.54,475.39)
  Top w50: v1(-228,873) v1@-228,875.2
  Bottom w5.91: C59.2@-3687.99,2825.79 -3650.59,2825.79 v1(-3649.61,2826.77) ; R27.2@-3431.1,755.45 -3428.15,758.4 R27.2@-3428.15,761.81 ; v1(-3379.92,1003.94) -3379.39,1003.4 C23.2@-3342,1003.4 -3342,1036.88 v1(-3342.52,1037.4) ; v1(-3362.2,1037.4) v1(-3342.52,1037.4) ; v1(-3318.9,1037.4) v1(-3342.52,1037.4) ; R26.2@-3224.41,546 R26.2@-3224.41,555.12 ; v1(-3064.96,2984.25) v1(-3045.28,2984.25) ; v1(-3064.96,3003.94) v1(-3045.28,3003.94) ; v1(-1480.32,266.14) U90052.D2@-1464.17,266.14 ; v1(-1303.15,181.1) -1303.15,183.29 ED27.2@-1282.14,183.29 ; v1(-1208.66,179.13) -1208.66,183.04 ED26.2@-1188.7,183.04 ; v1(-1201.77,897.64) -1192.91,894.68 -1189.96,891.73 -1189.96,890.66 ; U90056.D2@-1180.84,899.79 -1189.96,890.66 ; v1(-1179.13,614.17) -1178.15,613.19 U90055.D2@-1163.39,613.19 ; v1(-1169.29,800.2) -1169.29,826.77 -1177.61,835.09 -1177.61,831.89 -1193.52,847.79 -1193.52,887.11 -1189.96,890.66 ; v1(-1167.32,708.66) -1166.45,707.79 C90300.1@-1150.09,707.79 ; C90301.2@-1116.14,2332.68 -1099.32,2349.49 -1099.32,2362.31 -1090.94,2370.69 -1090.94,2380.07 -1085.83,2385.19 -1085.83,2478.7 -1079.51,2485.02 U13.33@-1076.93,2487.59 ; v1(-1110.24,2459.65) U13.33@-1077.76,2492.13 ; C68.2@-1103.15,2245.28 -1103.15,2226.77 -1077.17,2200.79 v1(-1077.17,2196.46) ; v1(-1087.8,934.25) -1086.22,932.68 C90299.1@-1071.93,918.37 ; v1(-1071.85,2459.65) -1074.97,2476.8 U13.33@-1076.93,2487.59 ; -1040.63,2539.37 -1038.39,2541.61 U13.23@-1038.39,2571.85 ; v1(-1007.09,2353.94) -1006.89,2353.74 C67.2@-1006.89,2332.68 ; v1(-963,2640) -962.76,2639.76 C69.2@-933.07,2639.76 ; U13.33@-1077.76,2492.13 U13.33@-1075.11,2488.19 ; U13.33@-1077.76,2492.13 U13.33@-1076.93,2487.59 ; U13.33@-1076.93,2487.59 -1076.33,2488.19 U13.33@-1075.11,2488.19 ; U13.33@-1075.11,2488.19 -1069.09,2479.22 -1060.2,2466 -1055.92,2470.29 -1051.18,2475.02 v1(-1051.18,2477.36) -1062.01,2488.19 U13.33@-1075.11,2488.19
  Bottom w6: v1(-3705,2316) -3696,2307 -3564,2307 -3543,2328 -3073.5,2328 -2980.5,2421 -2181,2421 -2151,2451 -2151,2508 -2133,2526 -2082,2526 -2067,2511 -2067,2469 -2055,2457 -1992,2457 -1971,2478 v1(-1971,2502) ; -3246,546.28 -3242.13,542.41 v1(-3242.13,516.73) ; v1(-2943,2340) -2903.91,2300.91 -2168.91,2300.91 -2082,2214 -2082,2208 ; v1(-2772,2499) v1(-2442,2499) v1(-2382,2499) v1(-2325,2499) -2292,2499 v1(-2145,2646) -2142,2649 v1(-2088,2649) ; v1(-2742,2928) -2742,2748 -2748,2742 -2595,2589 -2304,2589 -2265,2628 -2265,2685 -2253,2697 v1(-2253,2703) ; v1(-2616,3033) -2616,3030 -2625,3021 -2625,2805 -2481,2661 -2382,2661 -2370,2673 -2370,2697 -2355,2712 v1(-2319,2712) -2349,2742 -2406,2742 -2418,2730 -2484,2730 -2577,2823 -2577,2937 -2565,2949 -2565,3015 v1(-2502,3078) ; v1(-2484,2151) -2463,2151 -2400,2088 -2025,2088 -2001,2112 -2001,2154 -1959,2196 v1(-1959,2199) ; v1(-2217,2193) -2217,2175 -2208,2166 -2136,2166 -2127,2175 -2127,2199 -2118,2208 -2082,2208 ; v1(-2055,2178) -2055,2181 -2082,2208 ; v1(-1584,2190) -1560,2214 -1518,2214 -1503,2199 -1503,1521 v1(-1497,1521) ; C35.2@-1311.28,498 -1311.28,528 v1(-1311,528) ; C34.2@-1311.28,558 -1311.02,558 v1(-1311.02,581.69) ; C73.2@-1303.5,2472 -1303.5,2409.65 -1284,2390.15 J11.2@-1281,2390.15 ; U13.33@-1060.2,2466 -1051.18,2466 v1(-1051.18,2459.65) ; -585,2358 v1(-576,2367) v1@-575.82,2366.82
  Bottom w9.96: -1136.61,2252.76 -1136.61,2306.69
  Bottom w10: -2634,2550 -2286,2550 -2196,2640 v1(-2196,2676) ; U7.7@-1528.15,366.54 -1476.54,366.54 v1(-1476,366) ; v1(-1044,2496) -1040.63,2496 -1040.63,2539.37
  Bottom w11.81: -1136.61,2252.76 -1135.83,2252.76 -1128.35,2245.28 C68.2@-1103.15,2245.28 ; -1136.61,2306.69 -1116.14,2327.17 C90301.2@-1116.14,2332.68
  Bottom w13: v1(-3726,2436) -3791.75,2436 -3834,2393.75 -3834,1532.01 -3791.75,1489.76 U2.57@-3523.03,1489.76 ; v1(-3591,1725) -3590.02,1725.98 U2.33@-3523.03,1725.98 ; v1(-3588,1608) -3587.87,1607.87 U2.45@-3523.03,1607.87 ; U2.51@-3523.03,1548.82 -3460.63,1548.82 v1(-3460.63,1517.72) ; U2.39@-3523.03,1666.93 -3460.07,1666.93 v1(-3459,1668) ; U2.27@-3523.03,1785.04 -3468.04,1785.04 v1(-3468,1785) ; U2.21@-3523.03,1844.09 -3482.34,1844.09 -3472.17,1833.93 v1(-3469.49,1836.61) ; U2.15@-3523.03,1903.15 -3472.15,1903.15 v1(-3471,1902) ; U2.3@-3523.03,2021.26 -3491.54,2021.26 v1(-3472.44,2040.35) -3472.44,2040.94 U2.1@-3523.03,2040.94 ; v1(-3450,738) -3437.01,738 -3431.1,743.91 R27.2@-3431.1,755.45 ; v1(-3306,546) -3306,546.28 -3246,546.28 -3234,546.28 -3233.72,546 -3224.41,546 -3188.98,546 -3188.98,624.28 -3180.12,624.28 C24.1@-3180.12,628.94 ; v1(-3267,795) v1(-3243,795) -3222,795 -3207,810 -3207,839.15 U3.4@-3207.61,839.15 ; v1(-3186,2427) -3117,2496 -3036,2496 v1(-3033,2499) ; v1(-2730,2646) -2634,2550 ; U7.18@-1821.46,474.8 -1764.8,474.8 v1(-1764,474) ; v1(-1584,630) -1576.44,622.44 U7.33@-1528.15,622.44 ; v1(-1584,681) -1583.5,681.5 U7.39@-1528.15,681.5 ; v1(-1584,741) -1583.55,740.55 U7.45@-1528.15,740.55 ; v1(-1584,801) -1584,799.61 U7.51@-1528.15,799.61 ; v1(-1584,858) -1584,858.66 U7.57@-1528.15,858.66 ; v1(-1584,891) v1(-1584,918) ; U7.63@-1528.15,917.72 -1583.72,917.72 v1(-1584,918) ; U7.69@-1528.15,976.77 -1570.23,976.77 -1584,963 v1(-1584,918) ; Q1.2@-967.31,751.4 -967.31,784.69 v1(-966,786) ; v1(-885,759) -817.31,759 Q2.2@-817.31,751.4 ; C61.2@-876.28,2490 -849,2490 v1(-849,2472) ; R20.1@-876,581.72 v1(-876,609) ; v1(-873,2124) -872.72,2124.28 C82.2@-872.72,2151 ; v1(-835.63,2415.35) -815.72,2408.13 C62.2@-815.72,2406 ; Q4.2@-817.31,607.4 -781.4,607.4 v1(-780,606) ; v1(-738.19,2165.35) v1@-739.56,2165.35 ; v1(-737.01,2144.88) -737.01,2162.8 v1@-739.56,2165.35 ; U15.2@-702,2228.63 -711.84,2228.63 -729.06,2211.42 -729.57,2211.42 -736.22,2204.77 -736.22,2168.7 v1@-739.56,2165.35 ; C12.2@-678,749.72 v1(-678,789) ; ED18.2@-613,3288 -613,3261 v1(-612,3261) ; v1(-585,2343) -585,2358 ; v1(-552,3240) -552,3211 -535,3228 -482.55,3228 CN14.6@-480.93,3226.38 ; U11.2@-522,1137.37 -481.3,1137.37 v1(-481.3,1136.81) ; v1(-345,219) v1(-318,219) v1(-294,219) -293.72,219 C9.2@-293.72,252 ; C58.2@-324.28,1182 -310.04,1182 v1(-310.04,1251.97) ; C55.2@-318.28,1098 -318.28,1083.66 v1@-280.5,1083.66 ; C52.2@-280.5,1050 v1@-280.5,1083.66 ; v1(-274.61,1083.66) v1@-280.5,1083.66 ; v1(-271.65,1113.19) -280.5,1113.19 v1@-280.5,1083.66
  Bottom w15: C73.2@-1303.5,2472 -1297.5,2478 -1295.72,2478 -1295.72,2490 v1@-1286.86,2498.86 ; v1(-1293,2496) v1@-1286.86,2498.86 ; C74.2@-1274.72,2511 v1@-1286.86,2498.86
  Bottom w17.72: C64.2@-876.28,2538 -876.28,2566.22 C65.2@-868.5,2574 -866.54,2575.97 -866.54,2600.79 -857.48,2609.84 -756.3,2609.84 -742.13,2595.67 C63.2@-742.13,2574.8 -742.13,2569.68 -694.09,2521.65 -690.74,2508.66 v1@-687.8,2505.72 ; v1(-687.8,2498.03) v1@-687.8,2505.72 ; v1(-686.61,2479.53) -686.61,2504.53 v1@-687.8,2505.72
  Bottom w20: v1(-3501,-201) -3499.8,-199.8 J7.8@-3452.95,-199.8 ; v1(-3501,-111) -3500.78,-111.22 J7.7@-3452.95,-111.22 ; v1(-3435,-69) -3397.94,-69 J7.3@-3396.85,-67.91 ; J7.9@-3163.58,-199.8 v1(-3162.4,-248.03) ; J7.6@-3163.58,-111.22 -3117.22,-111.22 v1(-3117,-111) ; v1@-575.82,2366.82 -575.63,2366.63 U14.2@-534,2366.63 ; v1(-363,60) -361.5,58.5 Q3.2@-361.5,28 ; v1(-351,558) C4.2@-301.5,558 ; v1(-336,513) C5.2@-302.72,513 ; v1(-276,351) v1(-252,351) -250.6,358.4 C11.2@-250.6,402
  other v1: -3703.26,-249.92 -3603.26,-249.92 -3503.26,-249.92 -3403.26,-249.92 -3303.26,-249.92 -3203.26,-249.92 -3103.26,-249.92 -3003.26,-249.92 -2903.26,-249.92 -2803.26,-249.92 -2703.26,-249.92 -2603.26,-249.92 -2503.26,-249.92 -2403.26,-249.92 -2303.26,-249.92 -2203.26,-249.92 -1403.26,-249.92 -1303.26,-249.92 -1203.26,-249.92 -1103.26,-249.92 -1003.26,-249.92 -803.26,-249.92 -503.26,-249.92 -403.26,-249.92 -303.26,-249.92 -203.26,-249.92 -103.26,-249.92 -3,-231 57,-201 -2769.69,-197.83 -2716.54,-186.02 -3218.5,-183.07 -2340,-183 -1606.3,-183.07 -2439,-180 -2253,-180 -2553,-177 -1140,-177 -1056,-177 -2664,-174 -1251,-171 -2025,-168 -1347,-168 -1533,-165 -1488,-165 -552,-162 -2109,-159 -3803.26,-149.92 -3703.26,-149.92 -3603.26,-149.92 -3503.26,-149.92 -3303.26,-149.92 -203.26,-149.92 -3.26,-149.92 96.74,-149.92 -369,-120 39,-105 -66,-99 -3135.83,-79.72 -120,-75 93,-72 -3053.15,-70.87 -3503.26,-49.92 -3103.26,-49.92 -403.26,-49.92 -303.26,-49.92 -2713.58,-41.34 -138,0 -156,27 90,42 -3374.02,45.28 -2973.43,47.24 -3503.26,50.08 -3303.26,50.08 -3203.26,50.08 -3003.26,50.08 -2903.26,50.08 -2803.26,50.08 -111,54 -396,66 -267,69 -3433.07,86.61 -414,120 -3684,129 -3246,132 -3390,135 -1863,135 -1764,141 -2352,150 -3803.26,150.08 -3503.26,150.08 -3003.26,150.08 -2903.26,150.08 -2803.26,150.08 -2703.26,150.08 -2503.26,150.08 96.74,150.08 -2352,243 -3803.26,250.08 -2803.26,250.08 -2703.26,250.08 -2503.26,250.08 96.74,250.08 -1880.91,265.75 -873,285 -3696,288 -2124,288 -2305.51,304.33 -2034,309 -1886.81,318.9 -873,324 -2503.26,350.08 -873,357 -1887,420 -2349,444 -669,450 -3803.26,450.08 -2903.26,450.08 -2703.26,450.08 -2503.26,450.08 -2203.26,450.08 -2103.26,450.08 -703.26,450.08 -3054,456 -897,462 -867,462 -741,480 -693,486 -714,510 -3803.26,550.08 -3003.26,550.08 -2903.26,550.08 -2803.26,550.08 -2703.26,550.08 -2503.26,550.08 -2203.26,550.08 -2003.26,550.08 -2355,567 -738,621 -675,624 -3003.26,650.08 -2703.26,650.08 -2503.26,650.08 -1890,681 -2022,687 103.35,726.38 -3003.26,750.08 -2703.26,750.08 -2503.26,750.08 -2103.26,750.08 -2003.26,750.08 -503.26,750.08 -403.26,750.08 -930,753 100.39,782.48 -1977,795 100.39,835.63 -2929.13,841.54 -2775.59,841.54 -2874,843 -2703,843 -1903.26,850.08 -703.26,850.08 -603.26,850.08 -503.26,850.08 -403.26,850.08 -1713,864 -1350,867 100.39,885.83 -1896,903 -2946,906 -2808,906 -2679,906 -2550,906 -2343,906 -2103,906 -2034,906 -2997.05,906.5 -2973.43,906.5 -2914.37,906.5 -2878.94,906.5 -2846.46,906.5 -1347,918 -1725,921 -703.26,950.08 -603.26,950.08 -503.26,950.08 -1887,957 -3466.54,998.03 -3431.1,998.03 -1341,1041 -3303.26,1050.08 -703.26,1050.08 -603.26,1050.08 -466.54,1065.94 -654,1071 -1338,1095 -1842,1170 -1746,1170 -3847.44,1184.06 -2908.46,1184.06 -2878.94,1184.06 -2878.94,1204.72 -2935.04,1207.68 -2911.42,1207.68 -2949.8,1219.49 -3847.44,1228.35 -422.24,1240.16 -528,1245 -2703.26,1250.08 -3599.41,1269.68 -262.8,1278.54 -3847.44,1281.5 -2004,1284 -1878,1284 -1665,1284 -969,1284 -753,1284 -600,1284 -900.59,1284.45 -2340,1287 -1233,1287 -477,1293 -3383.86,1313.98 -3848.43,1324.8 -537,1341 -414,1341 -2100,1344 -1944,1344 -1554,1344 -1233,1344 -1005,1344 -939,1344 -840,1344 -696,1344 -648,1344 -3603.26,1350.08 -2703.26,1350.08 -2303.26,1350.08 -3685.04,1352.36 -11.81,1355.31 -3669.29,1370.08 -2657.48,1375.98 -141.73,1378.94 59.06,1381.89 -422.24,1393.7 -1739.17,1402.56 -2127,1404 -2031,1404 -1884,1404 -1713,1404 -1596,1404 -1503,1404 -1233,1404 -996,1404 -888,1404 -600,1404 -480,1407 -2920.28,1414.37 -2557.09,1417.32 -2478,1425 -2982.28,1429.13 -2331,1431 -2580.71,1443.9 -1665,1461 -1236,1461 -2079,1464 -1956,1464 -1821,1464 -942,1464 -741,1464 -546,1464 -423,1464 -2526,1473 -2277,1482 -2379,1494 -11.81,1508.86 -2481,1515 -1860,1521 -1758,1524 -1606.3,1523.62 -2861.22,1526.57 -1230,1527 -2669.29,1532.48 -679.13,1532.48 -2337,1542 -448.82,1547.24 -903.26,1550.08 -828,1551 -703.26,1550.08 -503.26,1550.08 -2982.28,1556.1 -2861.22,1559.06 -3304.13,1579.72 -2982.28,1585.63 -2289,1587 -2643,1590 -2861.22,1591.54 -2737.2,1597.44 -1692,1602 -1227,1602 -3301.18,1603.35 -1872,1608 -3616.14,1608.27 -459,1611 -1560,1614 -2878.94,1618.11 -2001,1620 -2982.28,1624.02 -3433.07,1627.95 -2085,1635 -2601,1638 -2700,1647 3.94,1647.64 -3403.26,1650.08 -3303.26,1650.08 -1803.26,1650.08 -1635,1653 -414,1662 -1745.08,1662.4 -903,1668 -723,1668 -8.86,1668.31 -3423.23,1679.13 -2565,1680 -1122,1683 -2652,1689 -1224,1698 -1731,1701 -2858.27,1703.74 -1830,1707 -3431.1,1712.6 97.44,1730.31 -2858.27,1742.13 -2634,1749 -2547,1749 -3403.26,1750.08 -3303.26,1750.08 -1703.26,1750.08 -1103.26,1750.08 -903.26,1750.08 -703.26,1750.08 -503.26,1750.08 -2787,1755 -2472,1767 97.44,1768.7 -1752,1770 -1224,1770 -2855.32,1780.51 -3597,1785 -2607,1815 97.44,1815.94 -2523,1818 -2727,1827 -2424,1827 -2855.32,1830.71 -543,1842 -23.62,1848.43 -3594,1851 -3303.26,1850.08 -1677,1851 -1218,1851 -803.26,1850.08 -403.26,1850.08 -153.54,1851.38 -112.2,1851.38 -73.82,1854.33 -1080,1863 97.44,1866.14 -2061,1869 -651,1875 -112.2,1880.91 -73.82,1883.86 50.2,1889.76 -2097,1899 -978,1899 -2016,1908 -112.2,1910.43 -2847,1917 -2550,1920 -2480.32,1919.29 -2364,1920 -2277,1920 -2127,1920 -2610,1923 -2852.36,1937.01 97.44,1937.01 -986.22,1948.82 -903.26,1950.08 -703.26,1950.08 -1656,1962 -1221,1962 -1959,1965 5.91,1972.44 -22.43,1973.31 51.57,1974.31 -2400,1989 -2043,1989 -135.83,1993.11 59.06,1996.06 -2850,1998 -2790,2001 -1231.3,2001.97 -643,2005 23.62,2019.68 -2884.84,2022.64 -2852.36,2025.59 -135.83,2025.59 -2445,2043 -2355,2043 -757.87,2051.18 -728.35,2051.18 -2864.17,2052.17 -3369,2061 -2846.46,2063.98 -730.32,2078.74 -134,2080 -759.84,2080.71 -937.8,2102.76 -144.69,2105.31 -124.02,2111.22 -1096.06,2114.57 -2316,2139 -1641,2166 -2822.83,2167.32 -2418,2184 -5.91,2273.62 -2991.14,2332.68 -2973,2343 -3103.26,2350.08 -5.91,2393.7 -3363,2406 -3039,2409 -3312,2415 -3129,2478 -1935,2484 -5.91,2511.81 -218.5,2574.8 -3660,2583 -3762,2625 -3.94,2627.95 -339,2637 -1593,2640 -3747,2652 -59.06,2681.1 -1971,2685 -1887,2685 -153.54,2687.01 -342,2694 -207,2694 -47.24,2710.63 -3125.98,2746.06 47.24,2746.06 -2072.83,2749.02 -2003.26,2750.08 -1845,2751 -3489,2763 -3447,2763 -159,2778 -3196.85,2789.37 -561,2790 -516,2793 -3405,2796 -3316.93,2799.21 -333,2808 43,2820 -534,2823 12,2826 -3196.85,2830.71 -3318.9,2838.58 -3658.46,2843.5 -2052,2850 -492,2850 -3403.26,2850.08 -2103.26,2850.08 47,2854 69,2873 -1854,2883 -1698,2886 -1968,2892 -150,2892 9,2892 -600,2895 -432,2898 -3498,2907 -1791,2910 -3328.74,2937.01 -3393.7,2944.88 -3458.66,2962.6 -2748,3006 -2550,3024 -618,3030 -3366.14,3037.4 -3316.93,3037.4 -3419.29,3041.34 -3645.67,3062.99 -3340.55,3062.99 -3444.88,3066.93 -3366.14,3088.58 -3316.93,3088.58 -3582.68,3100.39 -2816.93,3108.27 -3618,3111 -3179.13,3116.14 -3153.54,3116.14 -3179.13,3141.73 -3155.51,3141.73 -2203.26,3150.08 -3110.24,3151.57 -3829.72,3165.35 -939,3192 -3829.72,3194.88 -2094,3198 -1995,3210 -3744,3216 -3803.26,3250.08 -2203.26,3250.08 -1903.26,3250.08 -1803.26,3250.08 -1603.26,3250.08 -1303.26,3250.08 -1103.26,3250.08 -1003.26,3250.08 -303.26,3250.08 96.74,3250.08 -3440.94,3271.65 -3338.58,3273.62 -3275.59,3283.46 -3374.02,3299.21 -3338.58,3305.12 -3287.4,3305.12 -3263.78,3305.12 -3634.84,3315.94 -633,3342 -3703.26,3350.08 -2803.26,3350.08 -2403.26,3350.08 -2203.26,3350.08 -1903.26,3350.08 -1803.26,3350.08 -1703.26,3350.08 -1603.26,3350.08 -1103.26,3350.08 -903.26,3350.08 -303.26,3350.08 -103.26,3350.08 -372,3354 -333,3393 -639,3396 -261,3396 -180,3408 -1509.84,3425.2 -3834,3435 -2803.26,3450.08 -2703.26,3450.08 -2603.26,3450.08 -2503.26,3450.08 -2403.26,3450.08 -2203.26,3450.08 -2103.26,3450.08 -2003.26,3450.08 -1903.26,3450.08 -1803.26,3450.08 -1703.26,3450.08 -1603.26,3450.08 -903.26,3450.08 -303.26,3450.08 96.74,3450.08 -375,3453 -84,3462 -621,3468 -1702.76,3519.68 -1604.33,3531.5 -1807.09,3533.46 -3503.26,3550.08 -3403.26,3550.08 -3303.26,3550.08 -3203.26,3550.08 -3103.26,3550.08 -2803.26,3550.08 -2703.26,3550.08 -2603.26,3550.08 -2503.26,3550.08 -2403.26,3550.08 -2203.26,3550.08 -2103.26,3550.08 -2003.26,3550.08 -3591,3552 -1911.42,3568.9 -198,3570 -1551.18,3578.74 -138,3585 -321,3591 -417,3594 -3603.26,3650.08 -3403.26,3650.08 -3303.26,3650.08 -3203.26,3650.08 -2903.26,3650.08 -2803.26,3650.08 -2703.26,3650.08 -2603.26,3650.08 -2503.26,3650.08 -2403.26,3650.08 -2303.26,3650.08 -2203.26,3650.08 -2103.26,3650.08 -2003.26,3650.08 -1903.26,3650.08 -1803.26,3650.08 -1703.26,3650.08 -1603.26,3650.08 -1503.26,3650.08 -1403.26,3650.08 -1303.26,3650.08 -1203.26,3650.08 -1103.26,3650.08 -1003.26,3650.08 -903.26,3650.08 -803.26,3650.08 -703.26,3650.08 -603.26,3650.08 -171,3669 -93,3669 -3681,3690 -3528,3690
GPIO0-B0_U: CON1.16 U90054.D1 | length 930.6
  Top w5.91: U90054.D1@-2099.41,363.19 -2099.41,352.03 -1998.37,250.98 -1897.55,250.98 -1811.92,165.35 -1743.24,165.35 -1718.5,140.62 -1489.31,140.62 -1420.28,71.59 -1420.28,54.41 -1399.61,33.74 -1399.61,-2.76 CON1.16@-1370.47,-31.89
GPIO0-B1: CON1.12 U90056.B1 | length 1069.3
  Top w5.91: v1(-1216.54,510.83) -1216.54,715.55 -1214.57,717.52 -1214.57,718.5 -1183.07,750 -1133.86,750 -1120.08,763.78 v1(-1106.3,763.78)
  Bottom w5.91: v1(-1216.54,510.83) -1200.71,495 -1200.71,473.4 -1211.69,462.42 -1211.69,333.2 -1206.61,328.13 -1206.61,236.4 -1194.63,224.41 -1194.15,224.41 -1180.21,210.46 -1180.21,205.47 -1170.91,196.17 -1170.91,128.27 -1132.52,89.89 -1132.52,6.06 CON1.12@-1170.47,-31.89 ; U90056.B1@-1141.47,880.1 -1106.3,845.92 v1(-1106.3,763.78)
GPIO0-B5: CON1.7 U90056.C1 | length 1035.2
  Top w5.91: v1(-1160.43,543.31) -1181.1,543.31 -1198.82,561.02 -1198.82,706.69 -1173.23,732.28 -1124.02,732.28 -1124.02,735.24 v1(-1122.05,735.24)
  Bottom w5.91: U90056.C1@-1161.15,880.1 -1143.23,862.18 -1141.53,862.18 -1123.75,844.39 -1123.75,785.43 -1131.62,777.56 -1131.62,748.03 -1122.05,738.46 v1(-1122.05,735.24) ; v1(-1160.43,543.31) -1142.43,525.31 -1142.43,282.13 -1128.23,267.93 -1128.23,220.59 -1123.44,215.81 -1123.44,168.08 -1074.86,119.49 -1021.85,119.49 CON1.7@-970.47,68.11
GPIO0_A1_U: U7.6 | length 3344.2
  Top w6: v1(-1733.27,2409.45) -1709.65,2385.83 -1493.81,2385.83 -1482,2397.64 -1283.17,2397.64 -1203.44,2477.36 -1097.92,2477.36 -1063.39,2511.9 -1063.39,2567.72
  Bottom w6: U7.6@-1821.46,356.69 -1912.35,356.69 -2235.24,679.58 -2235.24,1380.72 -2079.04,1536.92 -2044.93,1536.92 -1934.01,1647.84 -1934.01,1660.47 -1730.16,1864.32 -1730.16,1960.5 -1681.96,2008.7 -1681.96,2156.18 -1696.05,2170.28 -1706.72,2170.28 -1721.46,2185.01 -1721.46,2225.82 -1718.46,2228.82 -1718.46,2382.71 -1733.27,2397.52 v1(-1733.27,2409.45)
GPIO0_B0_U: U90054.D3 | length 2702.2
  Top w5.91: -3258.27,2266.54 -3258.27,2170.49 -3131.1,2043.32 -3131.1,1347.29 -2879.28,1095.47 v1(-2267.72,1095.47) ; v1(-2158.46,513.78) -2158.46,480.33 -2099.41,421.28 U90054.D3@-2099.41,402.56
  Bottom w5.91: v1(-2267.72,1095.47) -2267.72,661.22 -2158.46,551.97 v1(-2158.46,513.78)
GPIO0_B1: U90056.B3 | length 3325.9
  Top w5.91: -3356.69,2266.54 -3356.69,2216.34 -3337.6,2197.24 -3334.49,2197.24 -3164.96,2027.71 -3164.96,1278.47 -2920.35,1033.86 -2112.64,1033.86 -2105.56,1040.94 -1811.76,1040.94 -1766.49,995.67 -1159.67,995.67 -1138.42,974.41 v1(-1113.19,974.41)
  Bottom w5.91: U90056.B3@-1141.47,919.47 -1141.47,931.37 -1133.86,938.98 -1133.86,962.6 -1124.02,972.44 -1113.19,972.44 v1(-1113.19,974.41)
GPIO0_B5: U90056.C3 | length 3349.7
  Top w5.91: -3474.8,2266.54 -3474.8,2203.15 -3352.36,2080.71 -3352.36,2043.41 -3218.5,1909.55 -3218.5,1250.28 -2954.44,986.22 -1856.67,986.22 -1825.18,954.72 -1202.39,954.72 -1191.56,965.55 v1(-1166.34,965.55)
  Bottom w5.91: v1(-1166.34,965.55) -1166.34,943.53 -1161.15,938.34 U90056.C3@-1161.15,919.47
GPIO1-A2: CON1.40 U90056.A1 | length 2307.8
  Top w5.91: v1(-2518.7,614.17) -2433.75,614.17 -2407.17,587.6 -2278.14,587.6 -2272.23,593.5 -2007.72,593.5 -2004.72,596.5 -1997.57,596.5 -1880.91,713.17 -1867.54,713.17 -1762.8,817.91 -1382.28,817.91 -1373.43,826.77 -1227.17,826.77 -1225.98,827.95 v1(-1087.01,827.95)
  Bottom w5.91: CON1.40@-2570.47,-31.89 -2608.43,6.06 -2608.43,163.39 -2542.32,229.49 -2542.32,590.55 v1(-2518.7,614.17) ; U90056.A1@-1121.78,880.1 -1087.01,845.33 v1(-1087.01,827.95)
GPIO1_A1: R92.1 | length 4488.1
  Top w6: -2657.87,2567.72 -2657.87,2517.47 -2557.6,2417.2 -1889.5,2417.2 -1872.52,2434.18 -1824.38,2434.18 -1817.9,2427.7 -1726.42,2427.7 -1721.82,2423.1 -1627.7,2423.1 -1580.92,2469.87 -1487.18,2469.87 -1485.43,2468.13 -1417.09,2468.13 -1416.21,2469 v1(-1368,2469) ; R92.1@-852.28,-168 v1(-831,-168)
  Bottom w6: v1(-1368,2469) -1407.87,2429.13 -1407.87,2304.62 -1188.98,2085.72 -1188.98,1070.31 -1259.84,999.44 -1259.84,878.77 -1245.05,863.97 -1245.05,761.2 -1212.75,728.91 -1212.75,532.03 -1179.51,498.79 -1179.51,258.1 -1166.92,245.51 -1166.92,208.96 -1159.04,201.08 -1159.04,139.91 -1120.57,101.43 -1120.57,-52.37 -1068.24,-104.69 -894.31,-104.69 v1(-831,-168)
GPIO1_A2: U90056.A3 | length 2888.4
  Top w5.91: v1(-2914.37,2093.5) -2884.25,2123.62 -2884.25,2266.54 ; v1(-2873.03,1999.02) -2873.03,1868.01 -2874.09,1866.95 -2874.09,1661.48 -2398.7,1186.09 -1650.18,1186.09 -1633.26,1169.17 -1202.17,1169.17 -1192.13,1179.21 -1121.24,1179.21 -1120.18,1178.15 v1(-1104.33,1178.15)
  Bottom w5.91: v1(-2914.37,2093.5) -2914.37,2077.26 -2869.02,2031.91 -2869.02,2014.84 -2873.03,2010.83 v1(-2873.03,1999.02) ; U90056.A3@-1121.78,919.47 -1116.69,924.56 -1116.69,945 -1097.36,964.33 -1097.36,1070.66 -1104.33,1077.63 v1(-1104.33,1178.15)
GPIO2-A2: CON1.36 U90053.C1 | length 416.2
  Top w5.91: U90053.C1@-2419.07,359 -2419.07,314.92 -2425.28,308.71 -2425.28,62.55 -2370.47,7.75 CON1.36@-2370.47,-31.89
GPIO2-A3: CON1.38 U90053.A1 | length 450.5
  Top w5.91: CON1.38@-2470.47,-31.89 -2520.87,18.5 -2520.87,112.2 -2536.42,127.76 -2536.42,281.02 U90053.A1@-2458.44,359
GPIO2-A4: CON1.35 U90054.C1 | length 746.8
  Top w5.91: v1(-2409.45,265.75) -2409.45,147.64 -2370.47,108.66 CON1.35@-2370.47,68.11 ; U90054.C1@-2119.09,363.19 -2119.09,343.36 -2049.21,273.47 v1(-2049.21,245.08)
  Bottom w5.91: v1(-2409.45,265.75) -2368.11,224.41 -2069.88,224.41 v1(-2049.21,245.08)
GPIO2-A6_D: CON1.18 U90054.B1 | length 893.2
  Top w5.91: U90054.B1@-2138.78,363.19 -2138.78,344.1 -2078.74,284.06 -2078.74,252.22 -2053.88,227.36 -1995.01,227.36 -1938.91,171.26 -1847.35,171.26 -1797.15,121.06 -1569.75,121.06 -1520.67,71.98 -1520.67,18.31 CON1.18@-1470.47,-31.89